# EAGLE board tempcontrol_mount2 (EAGLE 5.06)
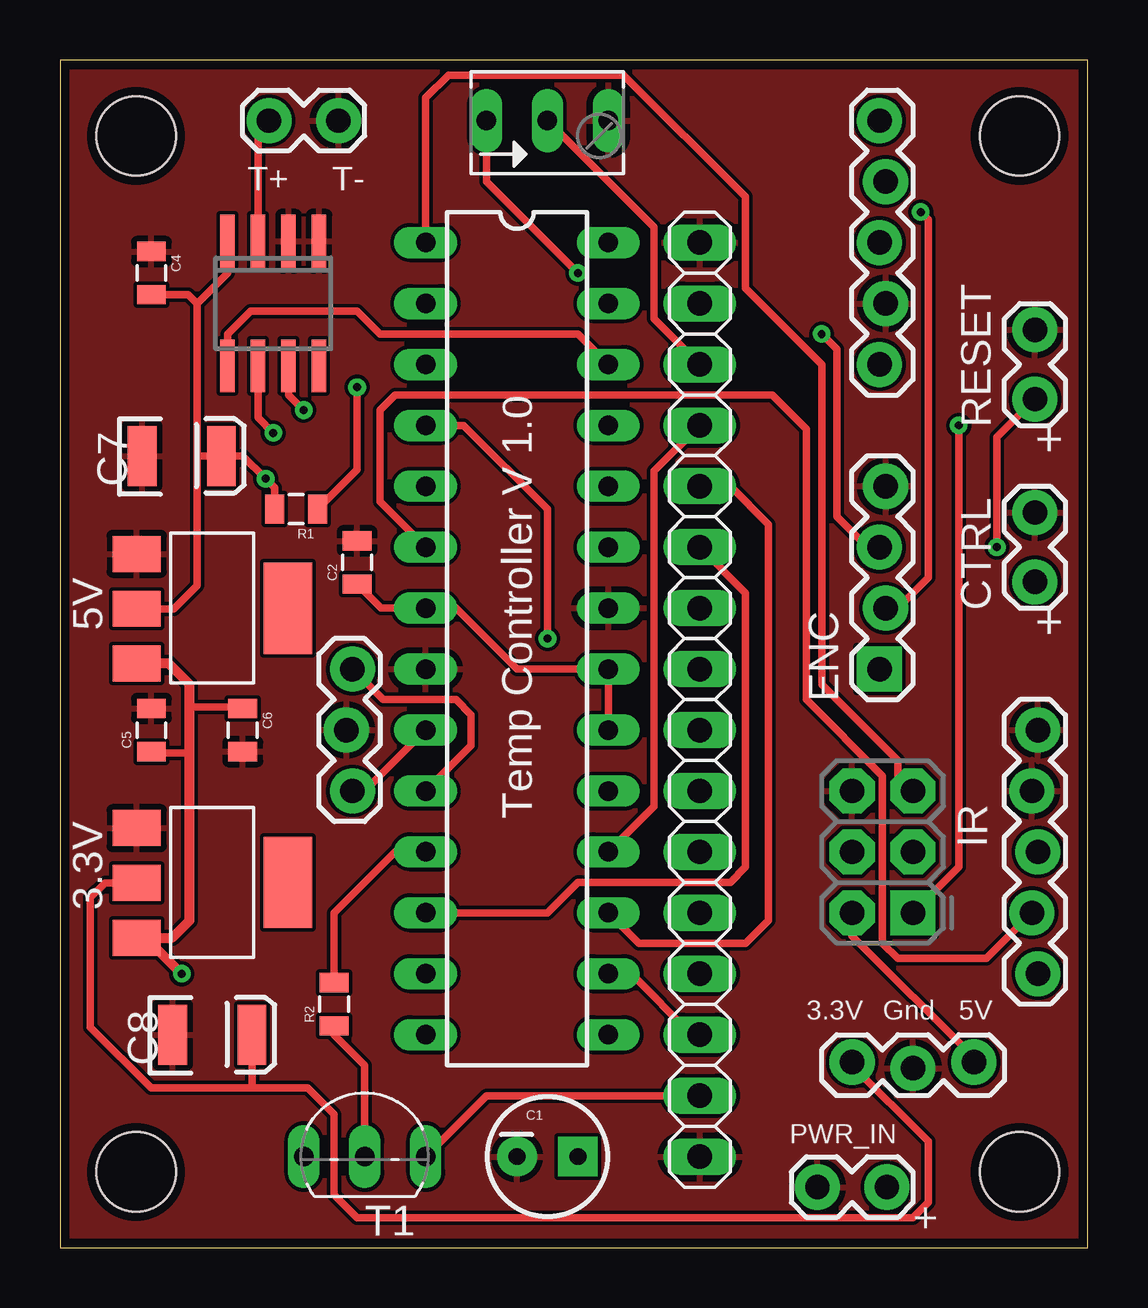
[diagram p0: board, top side]
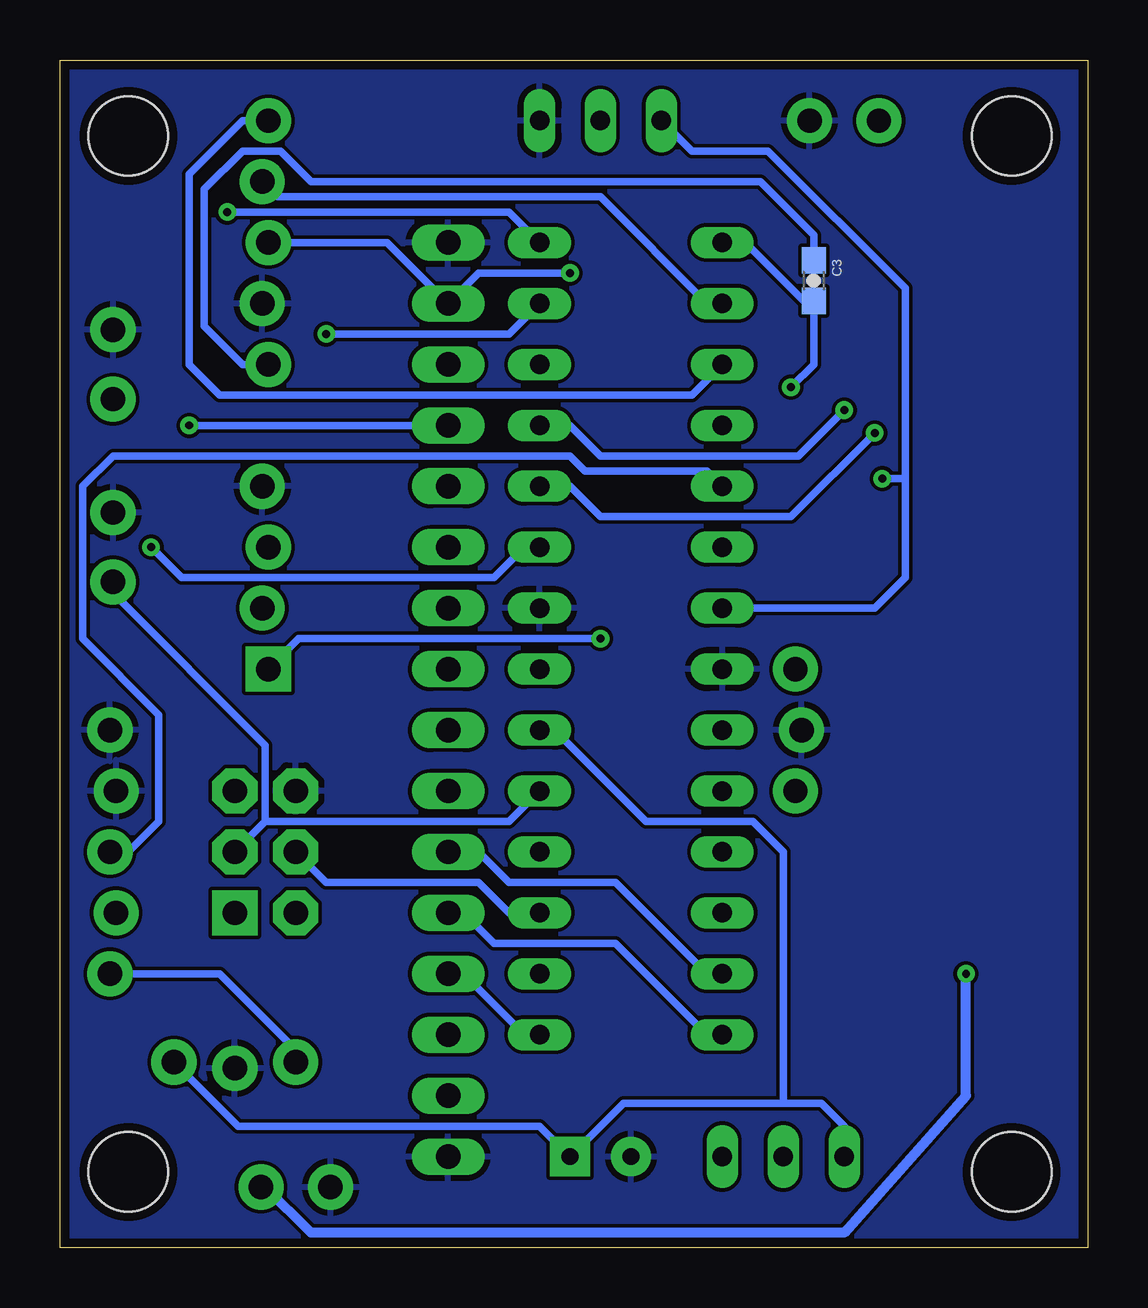
[diagram p1: board, bottom side, seen from below]

Size 42.85 x 49.52 mm. Coordinates in mm from the lower left corner, seen from the top.
Outline: 42.85,0 42.85,49.52 0,49.52 0,0 42.85,0
Copper layers (1*16): Top 0.0356mm / dielectric 1.5011mm / Bottom 0.0356mm
Design rules "LaenPCBOrder *": minimum track width 12mil, minimum drill 13mil, track to track 6mil, track to pad 6mil, pad to pad 6mil, via to via 6mil, smd to smd 6mil, copper to edge 15mil, drill to drill 6mil, minimum pad ring 10mil, minimum via ring 8mil, stop-mask expansion 4mil, vias tented up to drill 0mil, thermal gap 10mil

## Footprints (pad centres in the part's own frame; a part is rotated, then mirrored left to right if it is on the bottom)
SOT223 = smd 1.499 x 2.007: 1 -2.261,-3.15; 2 0.025,-3.15; 3 2.311,-3.15 | smd 3.81 x 2.007: 4 0,3.15
CPOL-RADIAL-10UF-25V = drill 0.7 pad 1.651 square: 1 1.27,0 | drill 0.7 pad 1.651 round: 2 -1.27,0
0805 = smd 0.8 x 1.2: 1 -0.9,0; 2 0.9,0
0603-CAP = smd 1.1 x 1: 1 -0.85,0; 2 0.85,0
EIA3528 = smd 1.2 x 2.5: A 1.65,0; C -1.65,0
1X02_LOCK = drill 1.016 pad 1.88 round: 1 -0.178,0; 2 2.718,0
1X04_LOCK = drill 1.016 pad 1.88 square: 1 0,0.127 | drill 1.016 pad 1.88 round: 2 2.54,-0.127; 3 5.08,0.127; 4 7.62,-0.127
DIL28-3 = drill 0.813 long: 1 -16.51,-3.81; 2 -13.97,-3.81; 3 -11.43,-3.81; 4 -8.89,-3.81; 5 -6.35,-3.81; 6 -3.81,-3.81; 7 -1.27,-3.81; 8 1.27,-3.81; 9 3.81,-3.81; 10 6.35,-3.81; 11 8.89,-3.81; 12 11.43,-3.81; 13 13.97,-3.81; 14 16.51,-3.81; 15 16.51,3.81; 16 13.97,3.81; 17 11.43,3.81; 18 8.89,3.81; 19 6.35,3.81; 20 3.81,3.81; 21 1.27,3.81; 22 -1.27,3.81; 23 -3.81,3.81; 24 -6.35,3.81; 25 -8.89,3.81; 26 -11.43,3.81; 27 -13.97,3.81; 28 -16.51,3.81
1X05_LOCK = drill 1.016 pad 1.88 round: 1 0,0.127; 2 2.54,-0.127; 3 5.08,0.127; 4 7.62,-0.127; 5 10.16,0.127
1X03_LOCK = drill 1.016 pad 1.88 round: 1 0,0.127; 2 2.54,-0.127; 3 5.08,0.127
1X16 = drill 1.016 long: 1 -19.05,0; 2 -16.51,0; 3 -13.97,0; 4 -11.43,0; 5 -8.89,0; 6 -6.35,0; 7 -3.81,0; 8 -1.27,0; 9 1.27,0; 10 3.81,0; 11 6.35,0; 12 8.89,0; 13 11.43,0; 14 13.97,0; 15 16.51,0; 16 19.05,0
B64Y = drill 0.813 long: A 2.54,0; E -2.54,0; S 0,0
TO92-EBC = drill 0.813 long: B 0,-1.27; C 2.54,-1.27; E -2.54,-1.27
2X3-NS = drill 1.016 pad 1.88 square: 1 -2.54,-1.27 | drill 1.016 pad 1.88 octagon: 2 -2.54,1.27; 3 0,-1.27; 4 0,1.27; 5 2.54,-1.27; 6 2.54,1.27
SO08 = smd 0.6 x 2.2: 1 -1.905,-2.6; 2 -0.635,-2.6; 3 0.635,-2.6; 4 1.905,-2.6; 5 1.905,2.6; 6 0.635,2.6; 7 -0.635,2.6; 8 -1.905,2.6
STAND-OFF = hole 3.302: 0,0

## Placement (x,y rotation side)
3.3V  REG1117  [SOT223]  6.35,15.24 270 top
5V  REG1117  [SOT223]  6.35,26.67 270 top
C1  47uF  [CPOL-RADIAL-10UF-25V]  20.32,3.81 0 top
C2  .1uF  [0805]  12.38,28.57 90 top
C3  .1uF  [0603-CAP]  11.43,40.32 270 bottom
C4  .1uF  [0805]  3.81,40.64 270 top
C5  .1uF  [0805]  3.81,21.59 90 top
C6  .1uF  [0805]  7.62,21.59 270 top
C7  10uF  [EIA3528]  5.08,33.02 0 top
C8  10uF  [EIA3528]  6.35,8.89 0 top
CTRL  [1X02_LOCK]  40.64,27.94 90 top
ENC  [1X04_LOCK]  34.29,24.13 90 top
IC1  MEGA168-P  [DIL28-3]  19.05,25.4 270 top
IR  [1X05_LOCK]  40.64,21.59 270 top
JP1  [1X03_LOCK]  12.07,24.13 270 top
JP7  LCD  [1X16]  26.67,22.86 270 top
PROG  PROG  [1X05_LOCK]  34.29,36.83 90 top
PWR_IN  [1X02_LOCK]  31.75,2.54 0 top
PWR_OUT  [1X03_LOCK]  33.02,7.62 0 top
R1  10K  [0805]  9.84,30.8 180 top
R2  1K  [0805]  11.43,10.16 90 top
R3  [B64Y]  20.32,46.99 0 top
RESET  [1X02_LOCK]  40.64,35.56 90 top
T1  [TO92-EBC]  12.7,5.08 0 top
THERMO  [1X02_LOCK]  11.43,46.99 180 top
U$1  [2X3-NS]  34.29,16.51 90 top
U$2  MAX6675  [SO08]  8.89,39.37 180 top
U$3  [STAND-OFF]  40,46.35 0 top
U$4  [STAND-OFF]  40,3.18 0 top
U$5  [STAND-OFF]  3.18,3.18 0 top
U$6  [STAND-OFF]  3.18,46.35 0 top

## Library data of the parts
3.3V 5V = mylib
C1-C8 CTRL ENC IR JP1 PROG PWR_IN PWR_OUT R1 R2 RESET THERMO U$1 U$3-U$6 = SparkFun
IC1 = atmel1
JP7 = pinhead
R3 = pot
T1 = transistor-neu-to92
U$2 = max6675

## Nets
*PROG_RESET: C3.1 PROG.1
*RESET: C3.2 IC1.1 R1.1 U$1.5
+3V3: 3.3V.2 C8.A IR.5 PWR_OUT.1
BL: JP7.15 T1.C
CONT: JP7.3 R3.S
D2: ENC.1 IC1.4
D3: IC1.5 IR.3
D4: IC1.6 IR.4
D5: IC1.11 R2.2
D6: IC1.12 JP7.6
D7: IC1.13 JP7.11
D8: IC1.14 JP7.12
D9: IC1.15 JP7.13
D10: IC1.16 JP7.14
D11: IC1.17 JP7.5 U$1.4
D12: IC1.18 JP7.4 U$1.1
D13: CTRL.1 IC1.19 U$1.3
D14: IC1.23 RESET.1
D15: IC1.24 U$2.6
D16: IC1.25 U$2.7
D17: IC1.26 U$2.5
D18: ENC.3 IC1.27
D19: ENC.2 IC1.28
GND: 3.3V.1 5V.1 C1.2 C2.2 C4.1 C5.2 C6.2 C7.C C8.C CTRL.2 ENC.4 IC1.8 IC1.22 IR.1 IR.2 JP1.2 JP7.1 JP7.16 PROG.2 PWR_IN.1 PWR_OUT.2 R3.A RESET.2 THERMO.1 U$1.6 U$2.1 U$2.2
N$7: R2.1 T1.B
POS_IN: 3.3V.3 5V.3 C5.1 C6.1 PWR_IN.2
RXD: IC1.2 PROG.4
T+: THERMO.2 U$2.3
TXD: IC1.3 PROG.5
VCC: 5V.2 C1.1 C2.1 C4.2 C7.A IC1.7 IC1.20 IC1.21 JP7.2 PROG.3 PWR_OUT.3 R1.2 R3.E T1.E U$1.2 U$2.4
XTAL1: IC1.9 JP1.3
XTAL2: IC1.10 JP1.1

## Tracks (layer width: path | path; a pad name or v marks a point on that pad's centre or on a via)
*PROG_RESET
  Bottom 0.305: PROG.1 35.24,36.83 36.83,38.42 36.83,44.13 35.24,45.72 33.65,45.72 32.38,44.45 13.65,44.45 11.43,42.23 C3.1
*RESET  (via drill 0.33)
  Top 0.305: U$1.5 34.92,19.69 34.92,20.32 31.75,23.49 31.75,36.83 28.57,40 28.57,43.81 23.5,48.89 16.19,48.89 15.24,47.94 IC1.1 | R1.1 12.38,32.44 v12.38,35.88
  Bottom 0.305: C3.2 11.43,38.73 | v12.38,35.88 11.43,36.83 C3.2 | IC1.1 14.29,41.91 11.85,39.47 C3.2
+3V3
  Top 0.305: PWR_OUT.1 33.02,7.62 36.2,4.45 36.2,1.91 35.56,1.27 12.38,1.27 11.43,2.22 11.43,5.56 10.33,6.67 7.94,6.67 | 3.3V.2 1.88,15.22 1.27,14.6 1.27,9.21 3.81,6.67 7.94,6.67 | C8.A 8,6.73 7.94,6.67
  Bottom 0.305: PWR_OUT.1 33.02,8.26 36.2,11.43 IR.5
BL
  Top 0.305: T1.C 17.78,6.35 JP7.15
CONT
  Top 0.305: R3.S 24.77,42.55 24.77,38.73 JP7.3
D2  (via drill 0.33)
  Top 0.305: IC1.4 16.83,34.29 20.32,30.8 v20.32,25.4
  Bottom 0.305: v20.32,25.4 32.89,25.4 ENC.1
D3
  Bottom 0.305: IC1.5 15.88,32.38 20.96,32.38 21.59,33.02 40.64,33.02 41.91,31.75 41.91,25.4 38.73,22.23 38.73,17.78 40,16.51 IR.3
D4
  Top 0.305: IC1.6 13.34,31.12 13.34,34.92 13.97,35.56 29.7,35.56 31.11,34.14 31.11,22.86 34.29,19.69 34.29,12.7 34.92,12.06 38.61,12.06 IR.4
D5
  Top 0.305: R2.2 11.43,13.97 13.97,16.51 IC1.11
D6
  Top 0.305: JP7.6 28.57,27.3 28.57,15.88 27.94,15.24 21.59,15.24 20.32,13.97 IC1.12
D7
  Bottom 0.305: JP7.11 25.4,16.51 24.13,15.24 19.68,15.24 15.88,11.43 IC1.13
D8
  Bottom 0.305: IC1.14 15.88,8.89 19.68,12.7 24.77,12.7 26.04,13.97 JP7.12
D9
  Bottom 0.305: JP7.13 26.04,11.43 23.5,8.89 IC1.15
D10
  Top 0.305: JP7.14 26.35,8.89 23.81,11.43 IC1.16
D11
  Top 0.305: IC1.17 24.13,12.7 28.57,12.7 29.53,13.65 29.53,30.16 27.94,31.75 JP7.5
  Bottom 0.305: U$1.4 31.75,15.24 25.4,15.24 24.13,13.97 IC1.17
D12  (via drill 0.33)
  Top 0.305: IC1.18 24.77,18.41 24.77,32.38 JP7.4 | U$1.1 37.46,15.88 v37.46,34.29
  Bottom 0.305: JP7.4 v37.46,34.29
D13
  Bottom 0.305: IC1.19 24.13,17.78 34.29,17.78 | 34.29,17.78 U$1.3 | 34.29,17.78 34.29,20.95 40.64,27.3 CTRL.1
D14  (via drill 0.33)
  Top 0.305: v39.05,29.21 39.05,33.8 RESET.1
  Bottom 0.305: v39.05,29.21 37.78,27.94 24.77,27.94 23.5,29.21 IC1.23
D15  (via drill 0.33)
  Top 0.305: U$2.6 8.26,34.61 v8.89,33.97
  Bottom 0.305: v8.89,33.97 12.38,30.48 20.32,30.48 21.59,31.75 IC1.24
D16  (via drill 0.33)
  Top 0.305: U$2.7 9.53,35.56 v10.16,34.92
  Bottom 0.305: v10.16,34.92 12.07,33.02 20.32,33.02 21.59,34.29 IC1.25
D17
  Top 0.305: IC1.26 21.59,38.1 13.34,38.1 12.38,39.05 7.94,39.05 6.99,38.1 U$2.5
D18  (via drill 0.33)
  Top 0.305: v31.75,38.1 32.38,37.46 32.38,30.48 33.65,29.21 ENC.3
  Bottom 0.305: IC1.27 24.13,38.1 v31.75,38.1
D19  (via drill 0.33)
  Top 0.305: v35.88,43.18 36.2,42.86 36.2,27.94 34.92,26.67 ENC.2
  Bottom 0.305: IC1.28 24.13,43.18 v35.88,43.18
GND
  pour Top: 0,49.53 42.86,49.53 42.86,0 0,0
  pour Bottom: 0,49.53 42.86,49.53 42.86,0 0,0
N$7
  Top 0.305: T1.B 12.7,7.62 11.43,8.89 R2.1
POS_IN  (via drill 0.33)
  Top 0.305: 3.81,12.7 3.3V.3 | C6.1 7.57,22.54 5.4,22.54 | C5.1 3.86,20.64 5.4,20.64
  Top 0.406: v5.08,11.43 3.81,12.7 | 5V.3 4.53,24.36 5.4,23.49 5.4,22.54 5.4,20.64 5.4,13.65 4.67,12.93 3.3V.3
  Bottom 0.305: 34.29,2.54 PWR_IN.2
  Bottom 0.406: 34.29,2.54 32.38,0.64 10.16,0.64 5.08,6.35 v5.08,11.43
RXD
  Bottom 0.305: IC1.2 15.88,39.37 20.32,43.81 33.78,43.81 PROG.4
T+
  Top 0.305: U$2.3 8.26,46.53 THERMO.2
TXD
  Bottom 0.305: IC1.3 16.51,35.56 36.2,35.56 37.46,36.83 37.46,44.77 35.24,46.99 PROG.5
VCC  (via drill 0.33)
  Top 0.305: IC1.20 IC1.21 19.05,24.13 16.51,26.67 IC1.7 13.39,26.67 C2.1 | v21.59,40.64 17.78,44.45 R3.E | U$2.4 6.99,40.64 5.71,39.37 | 5V.2 4.74,26.64 5.71,27.62 5.71,33.02 | R1.2 8.94,31.7 v8.57,32.07 7.62,33.02 C7.A 5.71,33.02 | PWR_OUT.3 38.1,7.94 33.02,13.02 U$1.2 | 5.71,39.37 5.35,39.74 C4.2 | 5.71,33.02 5.71,39.37
  Bottom 0.305: PROG.3 29.21,41.91 JP7.2 25.4,40.64 v21.59,40.64 | R3.E 16.51,45.72 13.34,45.72 7.62,40 7.62,32.07 | IC1.7 8.89,26.67 7.62,27.94 7.62,32.07 | 12.7,6.03 11.11,6.03 10.16,5.08 T1.E | 12.7,6.03 19.37,6.03 C1.1 22.86,5.08 35.43,5.08 PWR_OUT.3 | 12.7,6.03 12.7,16.51 13.97,17.78 18.41,17.78 22.23,21.59 IC1.20 | 7.62,32.07 v8.57,32.07
XTAL1
  Top 0.305: JP1.3 12.7,19.05 IC1.9
XTAL2
  Top 0.305: IC1.10 17.14,20.95 17.14,22.23 16.51,22.86 13.46,22.86 JP1.1

## Text on the board
tNames: T+ | T- | Temp Controller V 1.0 | + | + | 3.3V | Gnd | 5V | +